# Altium PCB FSAE_datalogger.PcbDoc
Units mm, origin at the board's own origin, x right, y up, seen from the top; angles counter-clockwise.
Board outline 100 x 54.5 mm, 2 copper layers (Top Layer, Bottom Layer); 91 components, 76 nets, 358 pads, 35 vias.
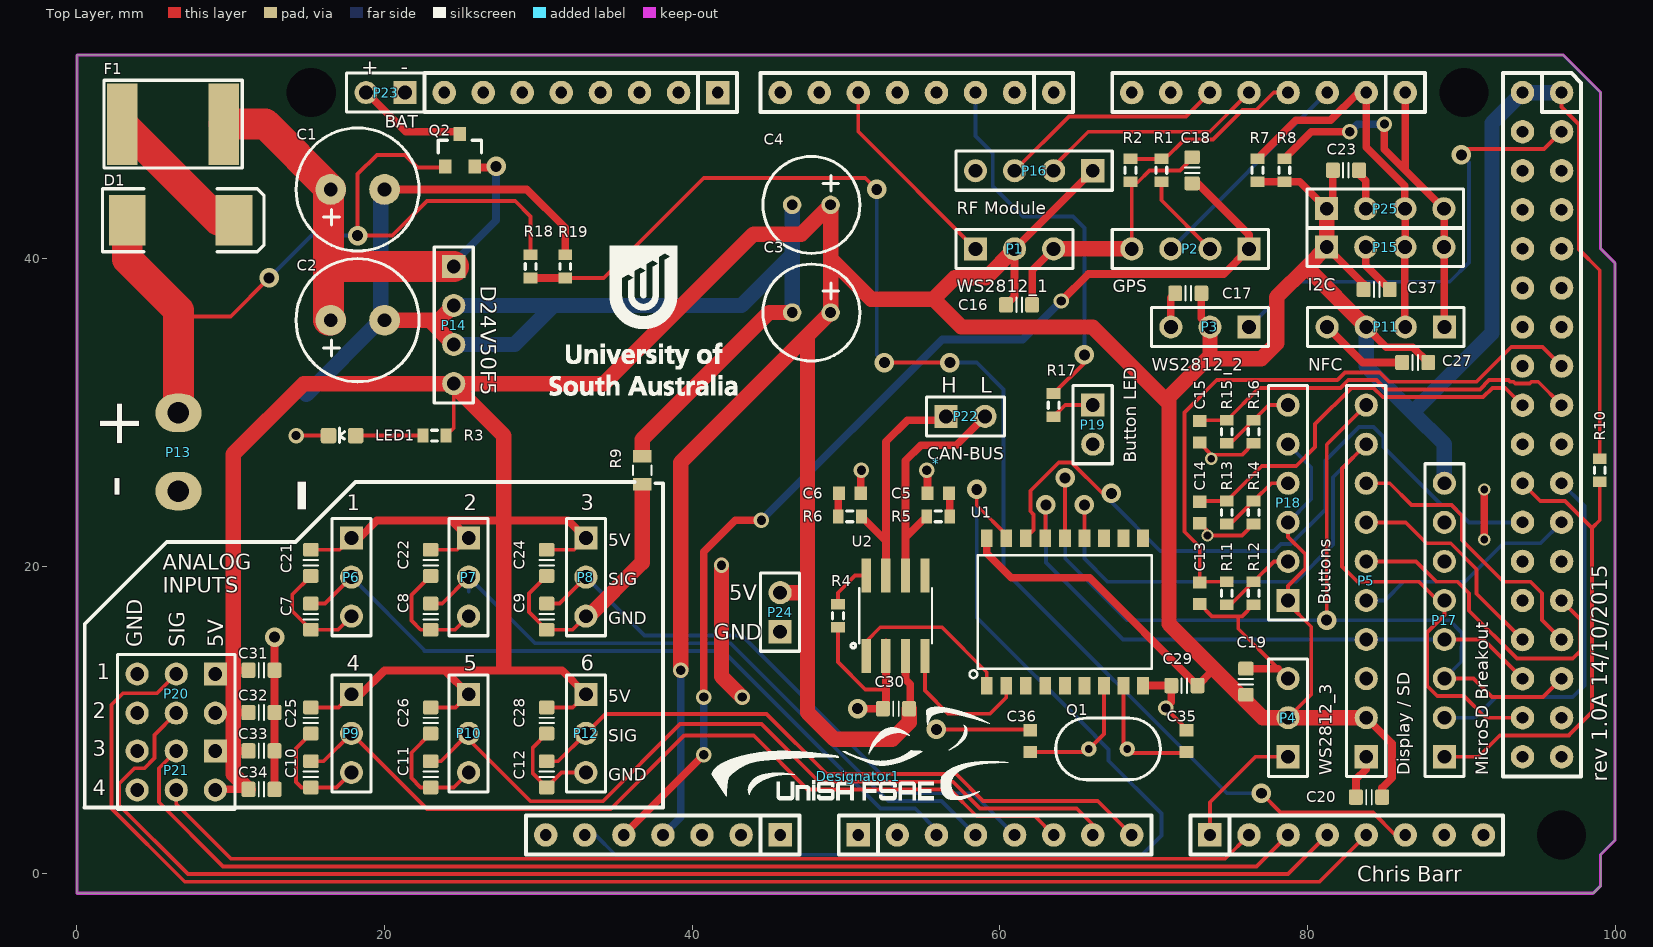
[diagram p0: Top Layer view]
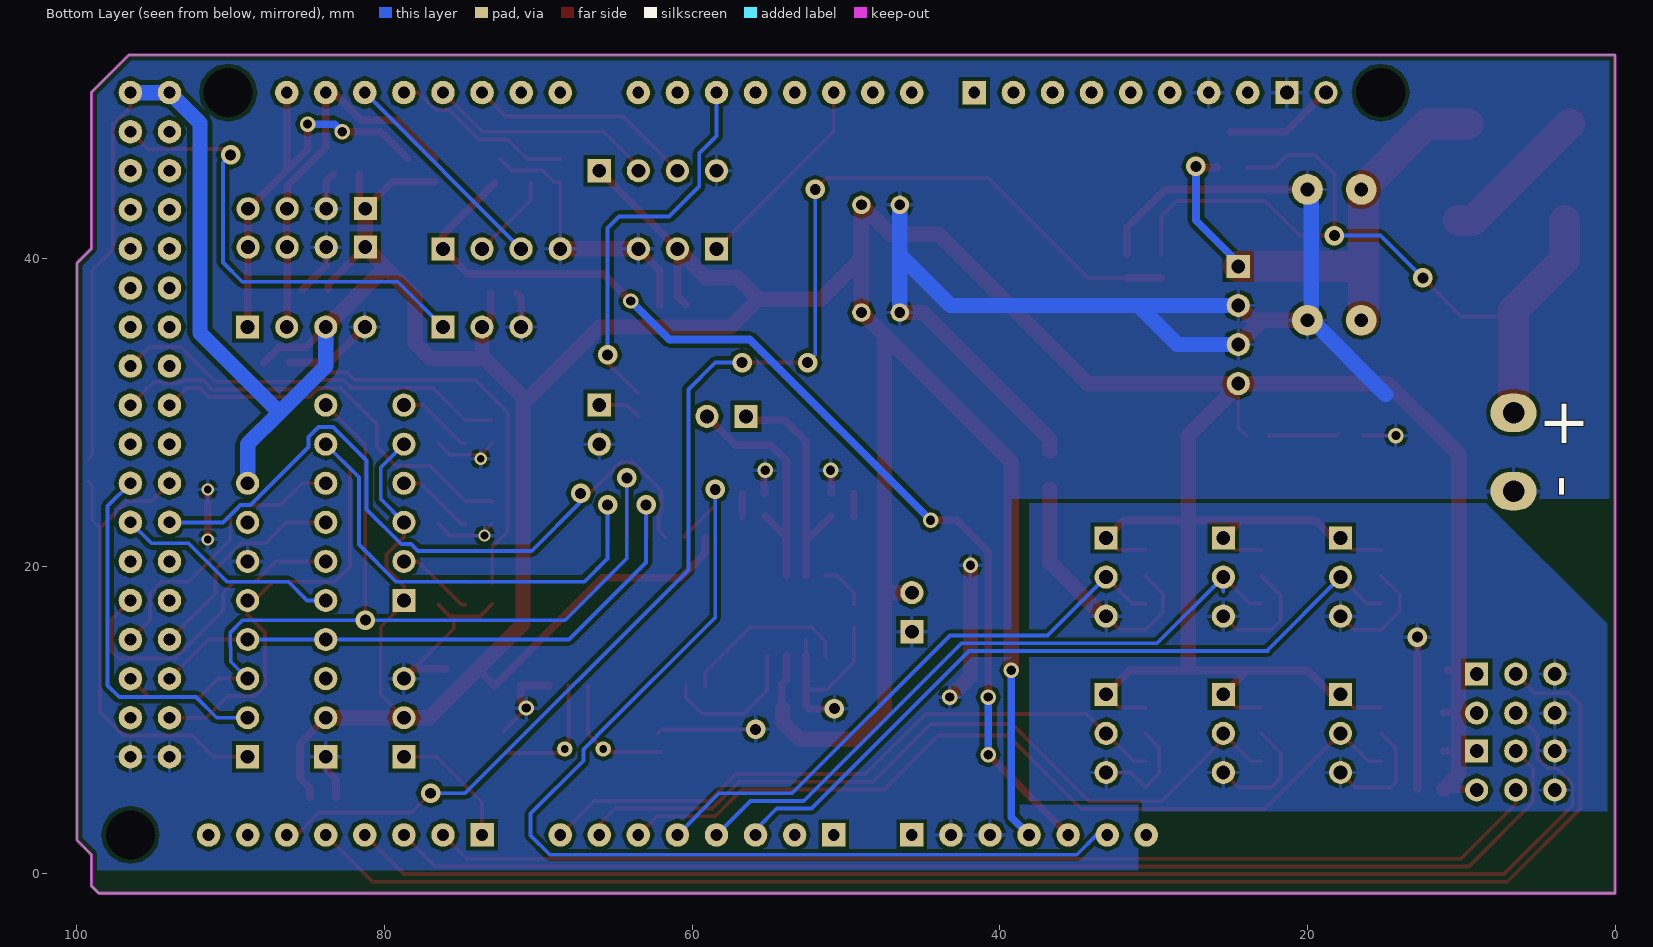
[diagram p1: Bottom Layer view, seen from below]

## Layer stack, top to bottom
Top Solder: solder mask 0.0102, Solder Resist, Dk 3.5
Top Layer: signal copper 0.0356
Dielectric1: dielectric 0.32, FR-4, Dk 4.8
Bottom Layer: signal copper 0.0356
Bottom Solder: solder mask 0.0102, Solder Resist, Dk 3.5

## Board outline
0,-1.25 0,53.25 96.61,53.25 99.06,50.8 99.06,40.64 100,39.7 100,2.21 99.06,1.27 99.06,-0.762 98.572,-1.25

## Design rules (kind name [scope] priority, off if disabled: settings)
Clearance [All] p1: gap=0.25
FabricationTestPointUsage TestPointUsage [All] p1: valid=0 allowmultiple=FALSE
FabricationTestpoint Testpoint [All] p1: side=3 testpointundercomponent=TRUE minsize=1.016 maxsize=2.54 preferedsize=1.524 minholesize=0 maxholesize=1.016 preferedholesize=0.813 testpointgrid=0.025 allowsidetop=TRUE allowsidebottom=TRUE usegrid=TRUE gridtolerance=0
HoleSize [All] p1: absolutevalues=TRUE maxlimit=3.5 minlimit=0.025 maxpercent=80.000 minpercent=20.000
PlaneClearance [All] p1: clearance=1
PlaneConnect [All] p1: planeconnectstyle=Relief reliefexpansion=0.5 reliefentries=4 reliefconductorwidth=0.25 reliefairgap=0.25
PolygonConnect [All] p1: connectstyle=Relief reliefconductorwidth=0.254 reliefentries=4 polygonreliefangle="90 Angle" airgapwidth=0.254
RoutingVias [All] p1: holewidth=0.711 width=1.27 viastyle="Through Hole" minholewidth=0.711 minwidth=1.27 maxholewidth=0.711 maxwidth=1.27
SilkToSolderMaskClearance SilkscreenOverComponentPads [IsPad] p1: minsilkscreentomaskgap=0.254 clearancetoexposedcopper=TRUE
SolderMaskExpansion [All] p1: expansion=0.102
Width Width_1 [(InNet('3.3V') OR InNet('5V') OR InNet('GND') OR InNet('VCC'))] p1: maxlimit=2 minlimit=0.25 preferedwidth=0.5 minimp=50.000000 maximp=50.000000 favimp=50.000000
Width [All] p2: maxlimit=2 minlimit=0.25 preferedwidth=0.25 minimp=50.000000 maximp=50.000000 favimp=50.000000
24 further rules are at their usual default settings.

## Components (designator, comment, footprint, x,y, rotation, side; value= is the part's Value field where it differs from the comment)
* "Arduino Mega2560 R3" "ARDUINO MEGA SHIELD - NO TEXT" 0,0 r0 top locked
C1 "35V 220uF" 8-DIA-CAP-3.5MM-LEADS 20,44.5 r180 top
C2 "35V 220uF" 8-DIA-CAP-3.5MM-LEADS 20,36 r180 top
C3 "16V 220uF" 6.3-DIA-CAP 46.5,36.5 r0 top
C4 "16V 220uF" 6.3-DIA-CAP 46.5,43.5 r0 top
C5 "Cap Ceramic" 1608[0603] 56,24.75 r0 top
C6 "Cap Ceramic" 1608[0603] 50.25,24.75 r180 top
C7 "approved sub OK" CAPC1608X90N 15.21,16.73 r270 top
C8 "approved sub OK" CAPC1608X90N 23,16.73 r270 top
C9 "approved sub OK" CAPC1608X90N 30.54,16.73 r270 top
C10 "approved sub OK" CAPC1608X90N 15.21,6.48 r270 top
C11 "approved sub OK" CAPC1608X90N 23,6.48 r270 top
C12 "approved sub OK" CAPC1608X90N 30.54,6.48 r270 top
C13 "Cap Ceramic" 1608[0603] 73,18.25 r270 top
C14 "Cap Ceramic" 1608[0603] 73,23.5 r270 top
C15 "Cap Ceramic" 1608[0603] 73,28.75 r270 top
C16 "approved sub OK" CAPC1608X90N 61.25,37 r0 top
C17 "approved sub OK" CAPC1608X90N 72.25,37.75 r180 top
C18 "approved sub OK" CAPC1608X90N 72.5,45.75 r90 top
C19 "approved sub OK" CAPC1608X90N 76,12.5 r90 top
C20 "approved sub OK" CAPC1608X90N 84,5 r0 top
C21 "approved sub OK" CAPC1608X90N 15.21,20.23 r270 top
C22 "approved sub OK" CAPC1608X90N 23,20.23 r270 top
C23 "approved sub OK" CAPC1608X90N 82.5,45.75 r0 top
C24 "approved sub OK" CAPC1608X90N 30.54,20.23 r270 top
C25 "approved sub OK" CAPC1608X90N 15.21,9.98 r270 top
C26 "approved sub OK" CAPC1608X90N 23,9.98 r270 top
C27 "approved sub OK" CAPC1608X90N 87,33.25 r0 top
C28 "approved sub OK" CAPC1608X90N 30.54,9.98 r270 top
C29 "approved sub OK" CAPC1608X90N 72,12.25 r180 top
C30 "approved sub OK" CAPC1608X90N 53.25,10.75 r0 top
C31 "approved sub OK" CAPC1608X90N 12,13.25 r0 top
C32 "approved sub OK" CAPC1608X90N 12,10.5 r0 top
C33 "approved sub OK" CAPC1608X90N 12,8 r0 top
C34 "approved sub OK" CAPC1608X90N 12,5.5 r0 top
C35 "Cap Ceramic" 1608[0603] 72.136,8.636 r90 top
C36 "Cap Ceramic" 1608[0603] 61.976,8.636 r90 top
C37 "approved sub OK" CAPC1608X90N 84.5,38 r180 top
D1 "Diode" SMC 6.75,42.5 r0 top
Designator1 "Comment" FSAE 50.8,6.35 r0 top
F1 "24V 3A PTC" "MF-LSMF SMD PTC Fuse" 6.25,48.75 r0 top
LED1 "Red" LED-0603 17.25,28.5 r90 top
P1 "WS2812_1" HDR1X3 58.42,40.64 r0 top
P2 "GPS" HDR1X4 76.2,40.64 r180 top
P3 "WS2812_2" HDR1X3 76.2,35.56 r180 top
P4 "WS2812_3" HDR1X3 78.74,7.62 r90 top
P5 "Display / SD" HDR1X10 83.82,7.62 r90 top
P6 "ANALOG_1" HDR1X3 17.85,21.84 r270 top
P7 "ANALOG_2" HDR1X3 25.47,21.84 r270 top
P8 "ANALOG_3" HDR1X3 33.09,21.84 r270 top
P9 "ANALOG_4" HDR1X3 17.85,11.68 r270 top
P10 "ANALOG_5" HDR1X3 25.47,11.68 r270 top
P11 "NFC" HDR1X4 88.9,35.56 r180 top
P12 "ANALOG_6" HDR1X3 33.09,11.68 r270 top
P13 "Power" "2P 5.08mm Screw Terminal" 6.604,29.972 r270 top
P14 "VREG PCB" HDR1X4 24.5,39.5 r270 top
P15 "I2C" HDR1X4 81.25,40.75 r0 top
P16 "RF Module" HDR1X4 66.04,45.72 r180 top
P17 "MicroSD Breakout" HDR1X8 88.9,7.62 r90 top
P18 "Buttons" HDR1X6 78.74,17.78 r90 top
P19 "Button LED" HDR1X2 66.04,30.48 r270 top
P20 "Header 3X2A" HDR2X3_CEN 9,13 r180 top
P21 "Header 3X2A" HDR2X3_CEN 9,8 r180 top
P22 "CAN-BUS" HDR1X2 56.5,29.75 r0 top
P23 "BAT" HDR1X2 21.336,50.8 r180 top
P24 "AUX-POWER" HDR1X2 45.72,15.748 r90 top
P25 "I2C_2" HDR1X4 81.25,43.25 r0 top
Q1 "16MHz" HC-46X 65.786,8.128 r0 top
Q2 "P-Channel" SOT23-3 24.892,46.99 r0 top
R1 "Res3" J1-0603 70.5,45.75 r270 top
R2 "Res3" J1-0603 68.5,45.75 r90 top
R3 "Res3" J1-0603 23.25,28.5 r0 top
R4 "4.7K" J1-0603 49.48,16.788 r90 top
R5 "100R" J1-0603 56,23.25 r180 top
R6 "100R" J1-0603 50.25,23.25 r0 top
R7 "Res3" J1-0603 76.75,45.75 r270 top
R8 "Res3" J1-0603 78.5,45.75 r270 top
R9 "Res3" 0805 36.75,26.25 r270 top
R10 "Res3" J1-0603 99,26.25 r90 top
R11 "10K" J1-0603 74.75,18.25 r90 top
R12 "10K" J1-0603 76.5,18.25 r270 top
R13 "10K" J1-0603 74.75,23.5 r90 top
R14 "10K" J1-0603 76.5,23.5 r270 top
R15 "10K" J1-0603 74.75,28.75 r90 top
R16 "10K" J1-0603 76.5,28.75 r270 top
R17 "150R" J1-0603 63.5,30.48 r90 top
R18 "10K" J1-0603 29.5,39.5 r270 top
R19 "4K" J1-0603 31.75,39.5 r270 top
U1 "MCP2515" SO-18W 64.23,17.038 r0 top
U2 "MCP2551" SO08 53.23,16.788 r0 top
? "Comment" UNISA2 36.83,37.846 r0 top

## Footprints (in the part's own frame and the unit in brackets; to place one, negate y for a bottom-side part, rotate by r counter-clockwise, add the part's x,y. Pads: shape width x height; smd on the part's side, far side on the other; paste and mask are expansions set on the pad)
"2P 5.08mm Screw Terminal" [mm]
  oval 2.5x3 hole 1.4: 0(0,0) 1(5.08,0)
6.3-DIA-CAP [mm]
  round 1.2 hole 0.7: 1(0,0) 2(2.5,0)
  silkscreen extent -1.9,-3.15 4.4,3.15, body extent -1.9,-3.15 4.4,3.15, height 12.2
8-DIA-CAP-3.5MM-LEADS [mm]
  round 2 hole 0.9: 1(0,0) 2(3.5,0)
  silkscreen extent -2.25,-4 5.75,4, body extent -2.25,-4 5.75,4, height 12.5
0805 [mil]
  rect 32x48 smd: 1(-35.43,0) 2(36,0)
  silkscreen extent -12,-24 12,24
1608[0603] [mm] "Chip Capacitor, Body 1.6x0.8mm, IPC High Density"
  rect 0.8x0.9 smd: 1(-0.7,0) 2(0.7,0)
  body extent -0.87,-0.48 0.87,0.48, height 1.3
"ARDUINO MEGA SHIELD - NO TEXT" [mil]
  round 62.99 hole 125.98: 0(600,2000) 0(3550,2000) 0(3800,100)
  round 60 hole 30: 2(2300,2000) 3(2200,2000) 3V3(1400,100) 4(2100,2000) 5(2000,2000) 5V(1500,100) 5V(3700,2000) 5V(3800,2000) 6(1900,2000) 7(1800,2000) 9(1540,2000) 10(1440,2000) 11(1340,2000) 12(1240,2000) 13(1140,2000) 22(3700,1900) 23(3800,1900) 24(3700,1800) 25(3800,1800) 26(3700,1700) 27(3800,1700) 28(3700,1600) 29(3800,1600) 30(3700,1500) 31(3800,1500) 32(3700,1400) 33(3800,1400) 34(3700,1300) 35(3800,1300) 36(3700,1200) 37(3800,1200) 38(3700,1100) 39(3800,1100) 40(3700,1000) 41(3800,1000) 42(3700,900) 43(3800,900) 44(3700,800) 45(3800,800) 46(3700,700) 47(3800,700) 48(3700,600) 49(3800,600) 50(3700,500) 51(3800,500) 52(3700,400) 53(3800,400) A1(2100,100) A2(2200,100) A3(2300,100) A4(2400,100) A5(2500,100) A6(2600,100) A7(2700,100) A9(3000,100) A10(3100,100) A11(3200,100) A12(3300,100) A13(3400,100) A14(3500,100) A15(3600,100) AREF(940,2000) GND(1040,2000) GND(1600,100) GND(1700,100) GND(3700,300) GND(3800,300) IOREF(1200,100) RESET(1300,100) RX0(2500,2000) RX1(3200,2000) RX2(3000,2000) RX3(2800,2000) SCL(3400,2000) SDA(3300,2000) TX0(2400,2000) TX1(3100,2000) TX2(2900,2000) TX3(2700,2000)
  rect 60x60 hole 30: 8(1640,2000) A0(2000,100) A8(2900,100) VIN(1800,100)
  silkscreen extent 890,50 3850,2050, body extent -250,-2 4000,2102, height 518
CAPC1608X90N [mm] "Chip Capacitor, Body 1.6x0.8mm, EIA 0603, IPC Medium Density"
  round 0.254 on Mech15: 0(0,0)
  rrect25% 0.9x1 smd: 1(-0.85,0) 2(0.85,0)
  Top Layer pour cut-out: -0.6,0.5 -0.4,0.7 0.4,0.7 0.6,0.5 0.6,-0.5 0.4,-0.7 -0.4,-0.7 -0.6,-0.5
  silkscreen extent -0.18,-0.48 0.18,0.48, body extent -0.85,-0.45 0.85,0.45, height 0.89
FSAE [mm]
  silkscreen extent -9.53,-1.52 9.74,4.51
HC-46X [mm]
  round 1 hole 0.5: 1(0,0) 2(2.5,0)
  silkscreen extent -2.15,-2 4.65,2
HDR1X2 [mm] "Connector; Header; 2 Position"
  rect 1.5x1.5 hole 0.9: 1(0,0)
  round 1.5 hole 0.9: 2(2.54,0)
  silkscreen extent -1.27,-1.27 3.81,1.27
HDR1X3 [mm] "Connector; Header; 3 Position"
  rect 1.5x1.5 hole 0.9: 1(0,0)
  round 1.5 hole 0.9: 2(2.54,0) 3(5.08,0)
  silkscreen extent -1.27,-1.27 6.35,1.27
HDR1X4 [mm] "Connector; Header; 4 Position"
  rect 1.5x1.5 hole 0.9: 1(0,0)
  round 1.5 hole 0.9: 2(2.54,0) 3(5.08,0) 4(7.62,0)
  silkscreen extent -1.27,-1.27 8.89,1.27
HDR1X6 [mm] "Connector; Header; 6 Position"
  rect 1.5x1.5 hole 0.9: 1(0,0)
  round 1.5 hole 0.9: 2(2.54,0) 3(5.08,0) 4(7.62,0) 5(10.16,0) 6(12.7,0)
  silkscreen extent -1.27,-1.27 13.97,1.27
HDR1X8 [mm] "Connector; Header; 8 Position"
  rect 1.5x1.5 hole 0.9: 1(0,0)
  round 1.5 hole 0.9: 2(2.54,0) 3(5.08,0) 4(7.62,0) 5(10.16,0) 6(12.7,0) 7(15.24,0) 8(17.78,0)
  silkscreen extent -1.27,-1.27 19.05,1.27
HDR1X10 [mm] "Connector; Header; 10 Position"
  rect 1.5x1.5 hole 0.9: 1(0,0)
  round 1.5 hole 0.9: 2(2.54,0) 3(5.08,0) 4(7.62,0) 5(10.16,0) 6(12.7,0) 7(15.24,0) 8(17.78,0) 9(20.32,0) 10(22.86,0)
  silkscreen extent -1.27,-1.27 24.13,1.27
HDR2X3_CEN [mm] "Connector; Header; 3x2 Position"
  rect 1.5x1.5 hole 0.9: 1(0,0)
  round 1.5 hole 0.9: 2(2.54,0) 3(5.08,0) 4(0,2.54) 5(2.54,2.54) 6(5.08,2.54)
  silkscreen extent -1.27,-1.27 6.35,3.81
J1-0603 [mm] "Chip Resistor, Body 1.6x0.8mm, IPC High Density"
  rect 0.7x0.9 smd: 1(-0.75,0) 2(0.75,0)
  silkscreen extent -0.2,-0.35 0.2,0.35, body extent -0.85,-0.48 0.85,0.48, height 0.9
LED-0603 [mil]
  rrect30% 40x40 smd: A(0,-34.53) C(0,35)
  silkscreen extent -18,-6 19,7
"MF-LSMF SMD PTC Fuse" [mm]
  rect 2x5.3 smd: 1(-3.3,0) 2(3.3,0)
  silkscreen extent -4.5,-2.85 4.5,2.85
SMC [mm] "DO-214-AB/SMC; 2 C-Bend Leads; Body 7.9 x 5.9 mm, inc. leads (LxW)"
  rect 2.4x3.3 smd: 1(-3.475,0) 2(3.475,0)
  silkscreen extent -5.07,-2.05 5.43,2.05
SO08 [mil]
  rect 24x87 smd: 1(-75,-103) 2(-25,-103) 3(25,-103) 4(75,-103) 5(75,103) 6(25,103) 7(-25,103) 8(-75,103)
  silkscreen extent -114,-82 93,71
SO-18W [mil]
  rect 30x45 smd: 1(-200,-188.5) 2(-150,-188.5) 3(-100,-188.5) 4(-50,-188.5) 5(0,-188.5) 6(50,-188.5) 7(100,-188.5) 8(150,-188.5) 9(200,-188.5) 10(200,189) 11(150,189) 12(100,189) 13(50,189) 14(0,189) 15(-50,189) 16(-100,189) 17(-150,189) 18(-200,189)
  silkscreen extent -244,-169 222,145
SOT23-3 [mil]
  rect 32x36 smd: 1(-37.4,-39.37) 2(38,-39.37) 3(0,44)
  silkscreen extent -55,-4 56,28
UNISA2 [mm]
  silkscreen extent -6.1,-6.71 6.1,2.99

## Part data
C1 C2 C3 C4: library part "Capacitor 50V 470uF"
C5 C6 C13 C14 C15 C35 C36: library part "Cap Semi", "Capacitor (Semiconductor SIM Model)"
C7 C8 C9 C10 C11 C12 C16 C17 C18 C19 C20 C21 C22 C23 C24 C25 C26 C27 C28 C29 C30 C31 C32 C33 C34 C37: library part CAPC_100n_0603_X7R_50V_10%, "Capacitor SMD Cer 100nF 10% 50V X7R 0603"
D1: "Default Diode"
F1: library part "Fuse 2", "Fuse"
LED1: library part LED0603, "Power Indicator"
P1 P3 P4 P6 P7 P8 P9 P10 P12: library part "Header 3", "Header, 3-Pin"
P2 P11 P14 P15 P16 P25: library part "Header 4", "Header, 4-Pin"
P5: library part "Header 10", "Header, 10-Pin"
P13: library part "2P Screw Terminal 5.08mm"
P17: library part "Header 8", "Header, 8-Pin"
P18: library part "Header 6", "Header, 6-Pin"
P19 P22 P23 P24: library part "Header 2", "Header, 2-Pin"
P20 P21: "Header, 3-Pin, Dual row"
Q1: library part CRYSTALHC49US
Q2: library part MOSFET_P-CH_NTE4151PT1G, "MOSFET SMD P-CH 20V 0.76A 0.313W SOT523F"
R1 R2 R3 R7 R8 R9 R10: "Resistor"
R4 R5 R6 R11 R12 R13 R14 R15 R16 R17 R18 R19: library part Res3, "Resistor"
U1: library part MCP2510SO

## Via types
v1: diameter 1.27, hole 0.711, Top Layer to Bottom Layer, 18 vias
v2: diameter 1, hole 0.6, Top Layer to Bottom Layer, 13 vias
v3: diameter 0.8, hole 0.5, Top Layer to Bottom Layer, 4 vias

## Nets (pads, with @x,y where several pads share a name; then routed paths per layer and width w, separated by ;. In a path a pad name is that pad's centre, name@x,y a point inside that pad or via, vN(x,y) a via of type N, cw(c..) or ccw(c..) an arc to the next point about the centre after c; other vN are vias at no path point)
3.3V: *.3V3 C18.1 P2.1 | length 69.8
  Top Layer w0.5: *.3V3 35.56,2.56 v2(40.75,7.75) ; v2(40.75,11.5) 40.75,20.938 42.812,23 v2(44.5,23) ; v2(64,37.25) 65.75,39 74.56,39 P2.1 76.2,41.55 C18.1@72.85,44.9
  Bottom Layer w0.5: v2@40.75,7.73 v2(40.75,7.75) v2(40.75,11.5) ; v2(44.5,23) 56.25,34.75 61.5,34.75 v2(64,37.25)
5V: *.5V C3.2 C4.2 C16.1 C17.1 C19.1 C20.2 C21.1 C22.1 C23.1 C24.1 C25.1 C26.1 C27.2 C28.1 C29.1 C30.2 C31.1 C32.1 C33.1 C34.1 C37.2 P1.2 P3.2 P4.2 P5.2 P6.1 P7.1 P8.1 P9.1 P10.1 P11.3 P12.1 P14.4 P15.1 P16.1 P17.8 P18.1 P18.3 P18.5 P20.1 P20.4 P21.1 P21.4 P24.2 P25.1 R3.2 R7.2 R8.2 R10.2 U1.18 U2.3 | length 469.1
  Top Layer w0.25: 14.753,31.88 14.87,31.88 ; C25.1 17,10.83 P9.1 P9.1@18.45,11.68 ; C21.1 17.09,21.08 P6.1 ; C26.1 24.62,10.83 P10.1 ; C22.1 24.71,21.08 P7.1 ; R3.2 24.5,29 24.5,31.75 P14.4 ; C28.1 32.24,10.83 P12.1 ; C24.1 32.33,21.08 P8.1 ; P4.2 80.25,11.67 80.25,16.071 78.74,17.581 P18.1 78.74,18.729 79.865,19.854 79.865,20.786 78.74,21.911 P18.3 ; *.5V@96.52,50.8 96.52,49.868 97.657,48.731 97.657,40.593 99,39.25 99,27.25 R10.2@99.25,27
  Top Layer w0.5: P21.1 C33.1 ; P20.1@9,13.25 C31.1@10.9,13.25 ; P21.4@9.04,5.5 C34.1 ; P20.4@9.04,10.5 C32.1 ; P6.1 18.36,21.84 19.5,22.98 24.33,22.98 ; P9.1@18.45,11.68 20,13.23 23.92,13.23 ; P10.1 23.92,13.23 ; P7.1 24.33,22.98 ; P12.1 31.54,13.23 23.92,13.23 ; P8.1 31.95,22.98 27.75,22.98 24.33,22.98 ; U2.3 53.865,12.653 54.18,12.338 54.18,11.288 ; U1.18 59.15,20.85 60.75,19.25 65.85,19.25 C29.1 73.805,13.205 74.045,13.205 ; C16.1 60.96,37.56 60.96,40.619 P1.2 P16.1 ; C17.1 73.1,36.12 P3.2 ; R7.2 R8.2 79.5,45 P25.1 81.65,43.65 C23.1@81.65,45.5 ; P15.1 83.65,38.35 C37.2 ; P5.2 85.5,8.48 85.5,6.25 84.85,5.6 C20.2 ; P11.3 85.13,34.25 86.85,34.25 C27.2
  Top Layer w1: C34.1 10.16,6.49 10.16,27.287 14.753,31.88 ; 14.87,31.88 P14.4 34.28,31.88 44,41.6 47.1,41.6 C4.2 49,40 ; P14.4@24.5,31.75 27.75,28.5 27.75,22.98 27.75,13.48 ; v2(39.25,13.25) 39.25,26.75 47.5,35 ; P24.2 47.5,18.288 ; C30.2 54.1,9.85 53,8.75 49.25,8.75 47.5,10.5 47.5,18.288 ; 55.81,37.375 51.625,37.375 49,40 ; P1.2@60.96,40.619 59.091,38.75 57.06,38.75 55.685,37.375 57.5,35.56 66.04,35.56 71,30.6 71,27.25 ; 73.66,33.66 P3.2 ; P25.1 P15.1 80,39.5 ; P5.2 P4.2 77.09,10.16 74.045,13.205 71,16.25 71,27.25 ; P11.3 80,39.38 80,39.5 ; 47.5,18.288 47.5,35 ; 47.5,35 C3.2 49,40 ; 71,27.25 71,31 73.5,33.5 77,33.5 78,34.5 78,37.5 80,39.5
  Bottom Layer w0.25: P18.3 80.25,24.37 80.25,26.43 P18.5
  Bottom Layer w0.5: *.5V@38.1,2.54 39.25,3.69 v2(39.25,13.25)
  Bottom Layer w1: P11.3 83.82,33.02 86.84,30 ; P17.8 88.9,27.94 86.84,30 ; *.5V@96.52,50.8 93.98,50.8 92,48.82 92,35.16 86.84,30
24: *.24
25: *.25
26: *.26
27: *.27
28: *.28
29: *.29
30: *.30
31: *.31
32: *.32
33: *.33
34: *.34
38: *.38
39: *.39
44: *.44
45: *.45
46: *.46
AGND: C7.2 C8.2 C9.2 C10.2 C11.2 C12.2 C21.2 C22.2 C24.2 C25.2 C26.2 C28.2 C31.2 C32.2 C33.2 C34.2 P6.3 P7.3 P8.3 P9.3 P10.3 P12.3 P20.3 P20.6 P21.3 P21.6 R9.2 | length 65
  Top Layer w0.25: C25.2 14.25,8.17 14.25,5.98 14.6,5.63 C10.2 16.88,5.63 P9.3 ; C21.2 14,18.17 14,17.09 C7.2 16.97,15.88 P6.3 ; C26.2 21.75,7.88 21.75,6.23 22.35,5.63 C11.2 24.5,5.63 P10.3 ; C22.2 21.75,18.13 21.75,16.48 22.35,15.88 C8.2 24.59,15.88 P7.3 ; C28.2 29.64,8.23 29.64,6.53 C12.2 31.51,6.6 P12.3 ; C24.2 29.39,18.23 29.39,17.03 C9.2 32.21,15.88 P8.3
  Top Layer w0.5: C34.2 C33.2 C32.2 C31.2 v1(12.85,15.4)
  Top Layer w1: P8.3@33.18,16.67 36.75,20.24 R9.2@36.75,25
BAT_LEVEL: D1.1 P13.0 Q2.1 R18.1 | length 60
  Top Layer w0.25: 7,36.25 10,36.25 v1(12.5,38.75) ; Q2.1@23.942,45.93 22.142,45.93 21.322,46.75 19.5,46.75 18.25,45.5 v1(18.25,41.5) 20.5,41.5 22.75,43.75 28.5,43.75 29.5,42.75 R18.1
  Top Layer w1: P13.0 7,30.368 7,36.25 6.604,36.646
  Top Layer w2: D1.1 3.275,39.975 6.604,36.646 P13.0
  Bottom Layer w0.25: v1(12.5,38.75) 15.25,41.5 v1(18.25,41.5)
BAT_READING: *.A13 R18.2 R19.2 | length 90.4
  Top Layer w0.25: R19.2 34.25,38.75 40.75,45.25 51.25,45.25 v1(52,44.5) ; v1(52.5,33.25) v1(56.75,33.25) ; v1(77,5.25) 78.25,4 84.25,4 85.71,2.54 *.A13
  Top Layer w0.5: R18.2 R19.2
  Bottom Layer w0.25: v1(52,44.5) 52,33.75 v1(52.5,33.25) ; v1(56.75,33.25) 58.5,33.25 60.25,31.5 60.25,19.76 74.76,5.25 v1(77,5.25)
BUTTON_1: *.35 C13.1 R11.2 | length 40.5
  Top Layer w0.25: R11.2 73.05,19 C13.1 73,21.25 72,22.25 72,30 74.105,32.105 81.941,32.105 82.441,32.605 84.7,32.605 85.305,32 91,32 93.25,34.25 95.29,34.25 *.35
BUTTON_2: *.36 C14.1 R13.2 | length 25.9
  Top Layer w0.25: C14.1 73.05,24.25 R13.2 77.025,26.525 79.275,26.525 80.5,27.75 80.5,29.25 82.855,31.605 84.286,31.605 84.891,31 91.414,31 92.019,31.605 92.855,31.605 *.36
BUTTON_3: *.37 C15.1 R15.2 | length 25.8
  Top Layer w0.25: C15.1@73.05,29.5 R15.2 76.855,31.605 82.148,31.605 82.648,32.105 84.493,32.105 85.098,31.5 91.207,31.5 91.812,32.105 93.062,32.105 93.167,32 93.392,32 93.509,31.883 94.451,31.883 94.568,32 95,32 *.37
BUTTON_LED: *.2 R17.2 | length 25.2
  Top Layer w0.25: R17.2 65.5,33.23 v1(65.5,33.75)
  Bottom Layer w0.25: *.2 58.42,47.97 59.545,46.845 59.545,44.705 61.5,42.75 64.75,42.75 65.5,42 v1(65.5,33.75)
CAN_CS: *.42 U1.16 | length 47
  Top Layer w0.25: U1.16 62.196,22.344 62.196,23.376 61.99,23.582 61.99,24.918 63.832,26.76 64.668,26.76 66.678,24.75 v1(67.25,24.75)
  Bottom Layer w0.25: v1(67.25,24.75) 67.25,24.178 70.428,21 77.829,21 78.274,21.445 78.916,21.445 81.17,23.699 81.17,26.881 83.354,29.065 84.286,29.065 84.945,28.406 84.945,27.764 88.724,23.985 89.366,23.985 90.491,22.86 *.42
CAN_HIGH: P22.1 R6.2 U2.7 | length 15.5
  Top Layer w0.5: R6.2 52.595,21.655 ; U2.7 52.595,21.655 ; P22.1 56.25,29.5 54,29.5 52.595,28.095 52.595,21.655
CAN_INT: U1.12
CAN_LOW: P22.2 R5.2 U2.6 | length 15.8
  Top Layer w0.5: U2.6 53.865,21.865 ; R5.2 53.865,21.865 ; P22.2 57.165,27.875 54.875,27.875 53.865,26.865 53.865,21.865
CAN_RXD: U1.2 U2.4 | length 9.4
  Top Layer w0.25: U2.4 55.135,11.921 56.642,10.414 59.356,10.414 60.42,11.478 U1.2
CAN_TXD: U1.1 U2.1 | length 11.2
  Top Layer w0.25: U2.1 51.325,15.133 52.23,16.038 56.23,16.038 59.15,13.118 U1.1
GND: *.GND C1.1 C2.1 C3.1 C4.1 C5.1 C6.1 C13.2 C14.2 C15.2 C16.2 C17.2 C18.2 C19.2 C20.1 C23.2 C27.1 C29.2 C30.1 C35.2 C36.2 C37.1 LED1.C P1.3 P2.4 P3.3 P4.3 P5.1 P11.4 P13.1 P14.2 P14.3 P15.2 P16.4 P17.6 P19.2 P23.1 P24.1 P25.2 R2.1 R4.1 R9.1 R12.2 R14.2 R16.2 R19.1 U1.9 U2.2 | length 186
  Top Layer w0.25: v2(14.25,28.5) LED1.C ; R4.1 49.48,13.77 51.25,12 52.595,12 ; U2.2 U2.2@52.595,15.173 ; v1(55.88,9.398) 61.976,9.398 C36.2@62.23,9.144 ; P2.4 68.58,44.97 68.97,44.97 69.725,45.725 71.725,45.725 C18.2@72.5,46.5 ; v2(70.78,10.788) C35.2@72.232,9.336 ; C13.2 73.8,16.75 75.5,16.75 ; C14.2 73.5,22.3 v3(73.5,22) 75.75,22 R14.2 ; C15.2 73,28 73.75,27.25 75.75,27.25 R16.2 ; R12.2 75.75,16.75 75.5,16.75 ; P4.3 78.09,13.35 75.5,15.94 75.5,16.75
  Top Layer w0.5: C1.1 29.25,44.5 31.75,42 R19.1 ; v1(50.75,10.75) C30.1 ; C6.1 50.95,26.2 v2(51,26.25) ; C30.1@52.595,11 52.595,12 U2.2 ; v2(55.25,26.25) 55.3,26.2 C5.1 ; C16.2 62.1,39.24 P1.3 ; U1.9 C29.2 71.15,11.158 v2(70.78,10.788) ; P3.3 71.12,37.47 C17.2 ; C19.2 78.09,13.35 ; P11.4 83.59,33.25 C27.1 ; C20.1 83.15,6.15 83.82,6.82 P5.1 ; C23.2@83.35,45.5 83.79,45.06 P25.2 ; P15.2 83.79,39.56 C37.1 ; v3(91.5,21.75) v3(91.5,25)
  Top Layer w1: C2.1@19.75,36 22.92,36 ; P14.3 22.92,36 ; P14.2 23.54,36 22.92,36 ; R9.1@36.75,27.5 36.75,28.25 45,36.5 C3.1 ; v2(41.91,20.066) 41.91,12.84 v2(43.25,11.5) ; P1.3 P2.4
  Bottom Layer w1: 14.92,31.17 C2.1@19.75,36 ; C1.1@19.75,44.5 C2.1@19.75,36 ; C2.1@20,36.25 C2.1@19.75,36 ; P14.3 28.46,34.42 31,36.96 ; P14.2 31,36.96 ; C3.1 46.5,40.25 ; C4.1 46.5,40.25 ; 31,36.96 43.21,36.96 46.5,40.25
  other v3: 73.75,27
GPS_RX: *.TX1 R1.1 R2.2 | length 12
  Top Layer w0.254: R2.2@68.58,46.47 70.72,46.47 71.998,47.748 73.858,47.748 75.771,49.661 76.672,49.661 77.811,50.8 *.TX1
GPS_TX: *.RX1 P2.3 | length 14.4
  Bottom Layer w0.254: P2.3 *.RX1
MISO: *.50 P5.4 P17.4 U1.15 | length 40
  Top Layer w0.25: U1.15 62.96,23.96 v1(63,24) ; P17.4 91.44,15.24 *.50
  Bottom Layer w0.25: v1(63,24) 63,20.25 68.01,15.24 P5.4 P17.4
MOSI: *.51 P5.10 P17.3 U1.14 | length 64.5
  Top Layer w0.25: U1.14 64.23,25.73 v1(64.25,25.75) ; v1(81.25,16.5) 81.25,27.91 P5.10 ; P17.3 90.8,12.7 92,11.5 95.32,11.5 *.51
  Bottom Layer w0.25: v1(64.25,25.75) 64.25,20.5 68.25,16.5 89.231,16.5 90.025,15.706 90.025,14.774 90,14.749 90,13.8 P17.3 ; P5.10 P5.10@84.27,30.48
NetC5_2: C5.2 R5.1 | length 1.5
  Top Layer w0.5: R5.1 C5.2@56.75,24.7
NetC6_2: C6.2 R6.1 | length 1.4
  Top Layer w0.5: R6.1 C6.2@49.5,24.7
NetC35_1: C35.1 Q1.2 U1.8 | length 8.2
  Top Layer w0.254: U1.8 68.04,8.374 68.54,7.874 C35.1@72.136,7.874
NetC36_1: C36.1 Q1.1 U1.7 | length 8.3
  Top Layer w0.254: C36.1 Q1.1@65.786,7.936 ; Q1.1 66.77,9.112 U1.7
NetD1_2: D1.2 F1.1 | length 9.9
  Top Layer w2: F1.1 9.2,42.5 D1.2
NetLED1_A: LED1.A R3.1 | length 4.6
  Top Layer w0.25: LED1.A@18,28.627 LED1.A R3.1
NetP2_2: P2.2 R1.2 | length 5.6
  Top Layer w0.25: R1.2@70.5,44.97 70.5,43.8 P2.2
NetP18_2: P18.2 R11.1 R12.1 | length 5.2
  Top Layer w0.25: R11.1 75,17.5 R12.1 77.82,20.32 P18.2
NetP18_4: P18.4 R13.1 R14.1 | length 5.1
  Top Layer w0.25: R13.1 75,22.75 R14.1 77.65,25.4 P18.4
NetP18_6: P18.6 R15.1 R16.1 | length 5
  Top Layer w0.25: R15.1 75,28 R16.1 77.48,30.48 P18.6
NetP19_1: P19.1 R17.1 | length 2.9
  Top Layer w0.25: R17.1 64.25,30.48 P19.1
NetP23_2: P23.2 Q2.3 | length 7.3
  Top Layer w0.5: P23.2 18.834,50.8 21.374,48.26 Q2.3@25,48.26
NetR4_2: R4.2 U2.8 | length 3.1
  Top Layer w0.25: R4.2 49.48,18.288 50.596,19.404 U2.8
OLED_CS: *.47 P5.6 | length 21.2
  Top Layer w0.25: P5.6 87.067,20.32 88.387,19 89.75,19 90.5,18.25 90.5,17.112 93.612,14 97.25,14 97.75,14.5 97.75,16.55 *.47
OLED_DC: *.49 P5.8 | length 18.9
  Top Layer w0.25: P5.8 85.35,25.4 86.765,23.985 89.366,23.985 90.025,23.326 90.025,21.725 92.75,19 94.5,19 95.25,18.25 95.25,16.51 *.49
OLED_RESET: *.48 P5.7 | length 14.2
  Top Layer w0.25: P5.7 86.39,22.86 87.75,21.5 89.311,21.5 91,19.811 91,18.22 *.48
OLED_SD_CS: *.43 P5.5 | length 14.8
  Bottom Layer w0.25: P5.5 85.03,17.78 86.25,19 90.25,19 92.75,21.5 95.16,21.5 *.43
POT_1: *.A2 C7.1 P6.2 | length 48.5
  Top Layer w0.25: C7.1 16.13,17.58 P6.2
  Bottom Layer w0.25: P6.2 22.606,14.544 ; 22.606,14.5 42,14.5 52.25,4.25 54.5,4.25 55.88,2.87 *.A2
POT_2: *.A3 C8.1 P7.2 | length 44
  Top Layer w0.25: C8.1 23.75,17.58 P7.2
  Bottom Layer w0.25: 25.47,18.351 P7.2 29.77,15 42.5,15 52.75,4.75 56.21,4.75 *.A3
POT_3: *.A4 C9.1 P8.2 | length 38.1
  Top Layer w0.25: C9.1 31.37,17.58 P8.2
  Bottom Layer w0.25: P8.2 36.89,15.5 43.25,15.5 53.5,5.25 58.25,5.25 *.A4
POT_4: *.A5 C10.1 P9.2 | length 55.9
  Top Layer w0.25: C10.1 16.04,7.33 P9.2 22.76,4.23 34,4.23 ; 33.782,4.23 34.71,4.23 39.48,9 44,9 47.5,5.5 56.75,5.5 58.5,3.75 62.29,3.75 *.A5
POT_5: *.A6 C11.1 P10.2 | length 51.3
  Top Layer w0.25: C11.1 23.66,7.33 P10.2 25.47,8.76 29.5,4.73 33.25,4.73 34.194,4.73 39.214,9.75 44.5,9.75 48.25,6 48.543,6 56.957,6 58.707,4.25 65,4.25 66.04,3.21 *.A6
POT_6: *.A7 C12.1 P12.2 | length 42.6
  Top Layer w0.25: C12.1 31.28,7.33 P12.2 34.36,10.41 44.84,10.41 48.75,6.5 57.164,6.5 58.914,4.75 66.37,4.75 *.A7
RF_RX: *.TX2 P16.3 | length 14.8
  Top Layer w0.25: P16.3 64.49,49.25 72.11,49.25 *.TX2
RF_TX: *.RX2 P16.2 | length 15
  Top Layer w0.25: P16.2 63.5,46 65.75,48.25 73.65,48.25 *.RX2
RS: *.RESET U1.17 | length 69.9
  Top Layer w0.25: v1(58.5,25) 58.5,23.971 60.5,21.971 U1.17@60.5,21.919
  Bottom Layer w0.25: *.RESET 33.71,2.54 35,1.25 69.25,1.25 70.5,2.5 70.5,3.922 67.056,7.366 67.056,8.095 66.181,8.97 66.181,9.003 58.5,16.684 v1(58.5,25)
SCK: *.52 P5.9 P17.5 U1.13 | length 60.1
  Top Layer w0.25: U1.13 v1(65.5,24) ; P5.9 82.25,26.37 82.25,20 83.25,19 87.25,19 88.47,17.78 P17.5 88.9,16.831 87.775,15.706 87.775,12.234 88.434,11.575 90.175,11.575 91.59,10.16 *.52
  Bottom Layer w0.25: v1(65.5,24) 65.5,20.5 67,19 79.25,19 81.67,21.42 81.67,25.79 P5.9
SCL: *.SCL P11.1 P15.4 P25.4 R8.1 | length 27.3
  Top Layer w0.5: R8.1 80.25,48.25 v2(82.75,48.25) ; v2(85,48.75) 85,47.12 86.36,45.76 ; *.SCL 86.36,45.76 ; P11.1 88.9,43.18 88.9,43.22 P25.4 86.36,45.76
  Bottom Layer w0.5: v2(82.75,48.25) 83.25,48.75 v2(85,48.75)
SD_CD: *.40 P17.1 R10.1 | length 31.8
  Top Layer w0.25: P17.1 91.12,7.62 92.5,9 97,9 97,9.032 98.5,10.532 98.5,22.5 ; *.40 95.13,24.25 96.75,24.25 98.5,22.5 ; R10.1@99.25,25.5 99,25.25 99,23 98.5,22.5
SD_CS: *.41 P17.2 | length 23.7
  Bottom Layer w0.25: P17.2 90.91,10.16 92.25,11.5 97.25,11.5 98,12.25 98,23.92 *.41
SDA: *.SDA P11.2 P15.3 P25.3 R7.1 | length 25.3
  Top Layer w0.5: R7.1 79.25,49 81.5,49 83.3,50.8 *.SDA 83.82,47.239 86.33,44.729 P25.3 86.36,43.22 P15.3@86.36,40.64 ; P15.3 86.33,35.59 P11.2
SS: *.53
THERM1: *.A12 P20.2 | length 96.6
  Top Layer w0.25: P20.2 5.21,11.75 3,11.75 2.25,11 2.25,4.25 7.008,-0.508 80.772,-0.508 *.A12
THERM2: *.A11 P20.5 | length 89.4
  Top Layer w0.25: P20.5 5.045,9.045 5.045,7.534 4.386,6.875 3.744,6.875 2.75,5.881 2.75,4.457 7.215,-0.008 78.732,-0.008 *.A11
THERM3: *.A10 P21.2 | length 79.8
  Top Layer w0.25: P21.2 5.335,6.875 5.335,4.665 9.508,0.492 76.692,0.492 *.A10
THERM4: *.A9 P21.5 | length 72.8
  Top Layer w0.25: P21.5 6.46,4.54 10.008,0.992 74.652,0.992 *.A9
VCC: C1.2 C2.2 F1.2 P14.1 Q2.2 | length 34.6
  Top Layer w0.5: Q2.2@25.857,45.93 27.18,45.93 v1(27.25,46)
  Top Layer w2: F1.2 12.25,48.75 C1.2 16.365,44.365 16.365,39.5 ; C2.2 16.365,36 16.365,39.5 ; P14.1 16.365,39.5
  Bottom Layer w0.5: P14.1 24.5,39.75 27.25,42.5 v1(27.25,46)
WS2812_1: *.5 P1.1 | length 13.3
  Top Layer w0.25: *.5 50.8,48.26 P1.1
WS2812_2: *.23 P3.1 | length 30.4
  Top Layer w0.25: v1(90,46.75) 90.373,47.123 95.383,47.123 *.23
  Bottom Layer w0.25: P3.1 79.14,38.5 89.25,38.5 90.5,39.75 90.5,46.25 v1(90,46.75)
WS2812_3: *.A8 P4.1 | length 8.4
  Top Layer w0.25: *.A8 73.66,4.66 76.62,7.62 P4.1
pads on no net: *.0 *.3 *.4 *.6 *.7 *.8 *.9 *.10 *.11 *.12 *.13 *.22 *.A0 *.A1 *.A14 *.A15 *.AREF *.IOREF *.RX0 *.RX3 *.TX0 *.TX3 *.VIN C7.0 C8.0 C9.0 C10.0 C11.0 C12.0 C16.0 C17.0 C18.0 C19.0 C20.0 C21.0 C22.0 C23.0 C24.0 C25.0 C26.0 C27.0 C28.0 C29.0 C30.0 C31.0 C32.0 C33.0 C34.0 C37.0 P5.3 P17.7 U1.3 U1.4 U1.5 U1.6 U1.10 U1.11 U2.5

## Polygon pours and split planes (outlines as drawn)
GND on Bottom Layer "GND" (solid, remove dead copper, pour order 6): -1.5,55.5 -1.75,55.25 -1.75,24.384 39.25,24.384 39.25,4.5 31,4.5 31,0.25 102.25,0.25 102.5,0 101.5,1 101.5,55.5
AGND on Bottom Layer "AGND" (solid, remove dead copper, pour order 8): 0.508,4.064 38.1,4.064 38.1,25.4 37.846,25.4 37.592,25.4 9.906,25.4 9.652,25.4 0.508,16.256

## Keep-outs
Keep-Out Layer:
  the board outline again, w0.2

## Silkscreen, mask and mechanical layers (free items; w line width, h text height)
Top Overlay:
  lines w0.25: 0.508,4.318 0.508,16.256 5.842,21.59 14.224,21.59
  lines w0.254: 0.508,4.318 38.1,4.318 38.1,25.4 37.604,25.4 ; 14.224,21.59 18.122,25.488 36.25,25.488
  text "+" at 18.5,52 h1
  text "-" at 21.04,52 h1
  text "D24V50F5" at 26.25,38.25 h1 r270
  text "H" at 56.18,31.29 h1
  text "L" at 58.72,31.29 h1
  text "+" at 1.524,30.988 h3 r270
  text "-" at 1.524,25.908 h3 r270
  text "1" at 17.53,23.634 h1
  text "2" at 25.15,23.634 h1
  text "3" at 32.77,23.634 h1
  text "-" at 16.51,23.368 h5 r90
  text "5V" at 34.54,21.31 h0.8
  text "SIG" at 34.54,18.77 h0.8
  text "ANALOG / INPUTS" at 5.588,18.288 h1
  text "5V" at 42.418,17.78 h1
  text "GND" at 34.54,16.23 h0.8
  text "GND" at 41.402,15.24 h1
  text "GND" at 4.25,14.75 h1 r90
  text "SIG" at 7,14.75 h1 r90
  text "5V" at 9.5,14.75 h1 r90
  text "4" at 17.53,13.22 h1
  text "5" at 25.15,13.22 h1
  text "6" at 32.77,13.22 h1
  text "1" at 1.28,12.65 h1
  text "5V" at 34.54,11.15 h0.8
  text "2" at 1.03,10.11 h1
  text "SIG" at 34.54,8.61 h0.8
  text "3" at 1.03,7.65 h1
  text "GND" at 34.54,6.07 h0.8
  text "rev 1.0A 14/10/2015" at 99.5,6 h1 r90
  text "4" at 1.03,5.11 h1
  text "Chris Barr" at 83.25,-0.5 h1
Bottom Overlay:
  text "+" at 4.572,30.988 h3 r90
  text "-" at 4.572,25.908 h3 r90
Mechanical 4:
  drawing of 198 lines, arcs and shapes, not listed
  text "I2C" at 79.375,70.485 h1.52 r90
  text "5V" at 81.915,70.485 h1.52 r90
  text "GND" at 84.455,70.485 h1.52 r90
  text "SDA" at 86.995,70.485 h1.52 r90
  text "SCL" at 89.535,70.485 h1.52 r90
  text "RF" at 51.435,64.77 h1.52 r90
  text "GND" at 53.975,64.77 h1.52 r90
  text "RX" at 56.515,64.77 h1.52 r90
  text "TX" at 59.055,64.77 h1.52 r90
  text "3.3" at 61.595,64.77 h1.52 r90
  text "GPS" at 65.405,64.77 h1.52 r90
  text "GND" at 67.945,64.77 h1.52 r90
  text "TX" at 70.485,64.77 h1.52 r90
  text "RX" at 73.025,64.77 h1.52 r90
  text "3.3" at 75.565,64.77 h1.52 r90
  text "I2C" at 79.375,64.77 h1.52 r90
  text "5V" at 81.915,64.77 h1.52 r90
  text "GND" at 84.455,64.77 h1.52 r90
  text "SDA" at 86.995,64.77 h1.52 r90
  text "SCL" at 89.535,64.77 h1.52 r90
  text "SIG" at 53.975,57.785 h1.52 r90
  text "5V" at 56.515,57.785 h1.52 r90
  text "GND" at 59.055,57.785 h1.52 r90
  text "GND" at 70.485,57.785 h1.52 r90
  text "5V" at 73.025,57.785 h1.52 r90
  text "SIG" at 75.565,57.785 h1.52 r90
  text "NFC" at 79.375,57.785 h1.52 r90
  text "GND" at 81.915,57.785 h1.52 r90
  text "5V" at 84.455,57.785 h1.52 r90
  text "SDA" at 86.995,57.785 h1.52 r90
  text "SCL" at 89.535,57.785 h1.52 r90
  text "WS_1" at 51.435,57.15 h1.52 r90
  text "WS_2" at 67.945,57.15 h1.52 r90
  text "Buttons" at 105.41,33.02 h1.52
  text "Display / SD" at 124.46,33.02 h1.52
  text "BUTTON_3" at 105.41,30.48 h1.52
  text "MOSI" at 124.46,30.48 h1.52
  text "5V" at 105.41,27.94 h1.52
  text "SCK" at 124.46,27.94 h1.52
  text "MicroSD" at 143.51,27.94 h1.52
  text "BUTTON_2" at 105.41,25.4 h1.52
  text "OLED_DC" at 124.46,25.4 h1.52
  text "5V" at 143.51,25.4 h1.52
  text "5V" at 105.41,22.86 h1.52
  text "OLED_RS" at 124.46,22.86 h1.52
  text "N/C" at 143.51,22.86 h1.52
  text "BUTTON_1" at 105.41,20.32 h1.52
  text "OLED_CS" at 124.46,20.32 h1.52
  text "GND" at 143.51,20.32 h1.52
  text "5V" at 105.41,17.78 h1.52
  text "OLED_SD_CS" at 124.46,17.78 h1.52
  text "SCK" at 143.51,17.78 h1.52
  text "WS_3" at 104.775,15.24 h1.52
  text "MISO" at 124.46,15.24 h1.52
  text "MISO" at 143.51,15.24 h1.52
  text "GND" at 105.41,12.7 h1.52
  text "N/C" at 124.46,12.7 h1.52
  text "MOSI" at 143.51,12.7 h1.52
  text "5V" at 105.41,10.16 h1.52
  text "5V" at 124.46,10.16 h1.52
  text "SD_CS" at 143.51,10.16 h1.52
  text "SIG" at 105.41,7.62 h1.52
  text "GND" at 124.46,7.62 h1.52
  text "SD_CD" at 143.51,7.62 h1.52
Mechanical 16:
  drawing of 1873 lines, arcs and shapes, not listed
  text "1" at -53.754,109.611 h0.8
  text "2" at 18.89,109.611 h0.8
  text "3" at 92.042,109.611 h0.8
  text "4" at 164.94,109.611 h0.8
  text "A" at -88.095,86.599 h0.8
  text "B" at -88.095,38.542 h0.8
  text "C" at -88.095,-9.972 h0.8
  text "C" at 198.925,-9.972 h0.8
  text "ENGINEER:" at 83.99,-46.98 h0.8
  text "TITLE:" at 122.09,-46.98 h0.8
  text "PCB DESIGNER:" at 83.99,-54.473 h0.8
  text "D" at -88.095,-57.978 h0.8
  text "D" at 198.925,-57.978 h0.8
  text "DATE:" at 83.99,-62.22 h0.8
  text "PART NO.:" at 122.09,-62.22 h0.8
  text "REV:" at 175.43,-62.22 h0.8
  text "Altium Limited" at 50.97,-64.76 h0.8
  text ".PRINT_DATE" at 85.26,-65.268 h0.8
  text "12a Rodborough Rd" at 50.97,-67.3 h0.8
  text "Frenchs Forest" at 50.97,-69.84 h0.8
  text "FILE NAME:" at 83.99,-69.84 h0.8
  text "DWG NO:" at 122.09,-69.84 h0.8
  text "SCALE:" at 175.43,-69.84 h0.8
  text "NSW 2086" at 50.97,-72.38 h0.8
  text ".PCB_FILE_NAME_NO_PATH" at 85.26,-72.888 h0.8
  text "1" at -53.754,-78.349 h0.8
  text "2" at 18.89,-78.349 h0.8
  text "3" at 92.042,-78.349 h0.8
  text "4" at 164.94,-78.349 h0.8

## Dimensions
0,53.25 to 100,39.7 on Mechanical 1
0,-1.25 to 0,53.25 on Mechanical 1